# Altium PCB 新苗.PcbDoc
Units mil, origin at the board's own origin, x right, y up, seen from the top; angles counter-clockwise.
Board outline 6000 x 4000 mil, 2 copper layers (Top Layer, Bottom Layer); 35 components, 128 nets, 275 pads, 55 vias.
Unrouted connection lines stored in the file: 49.
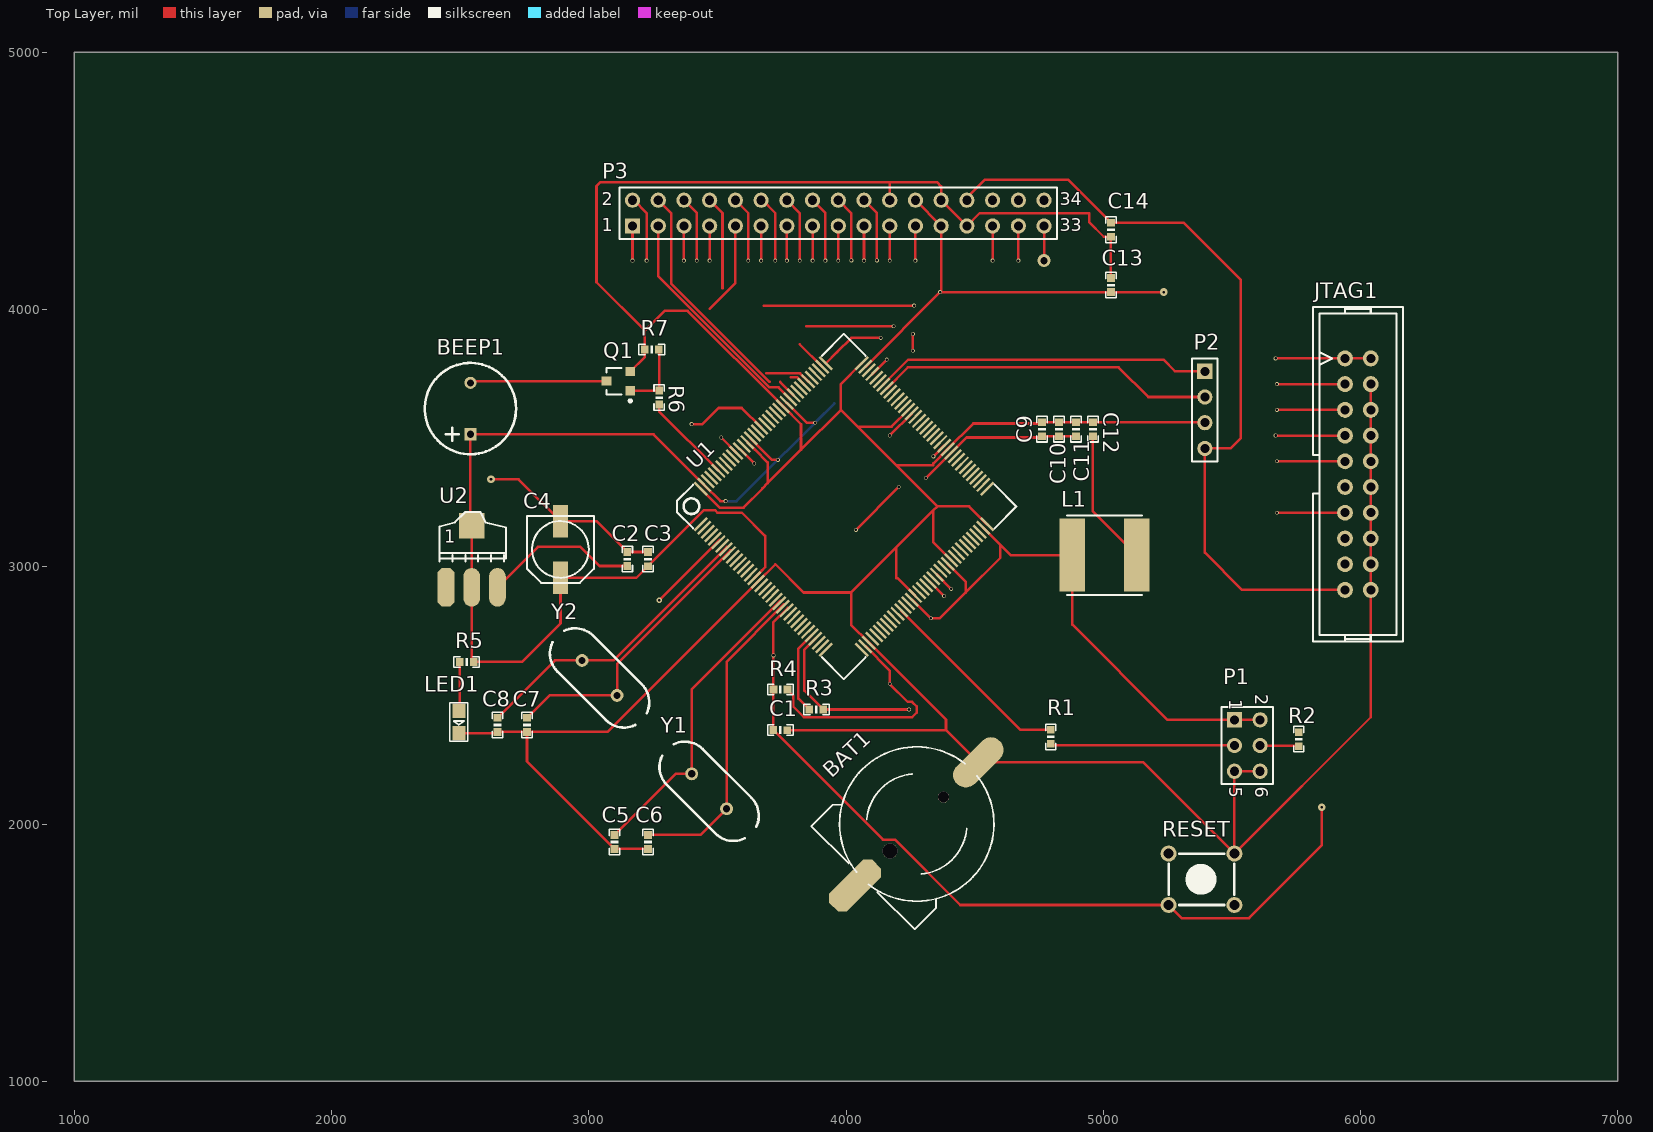
[diagram p0: Top Layer view]
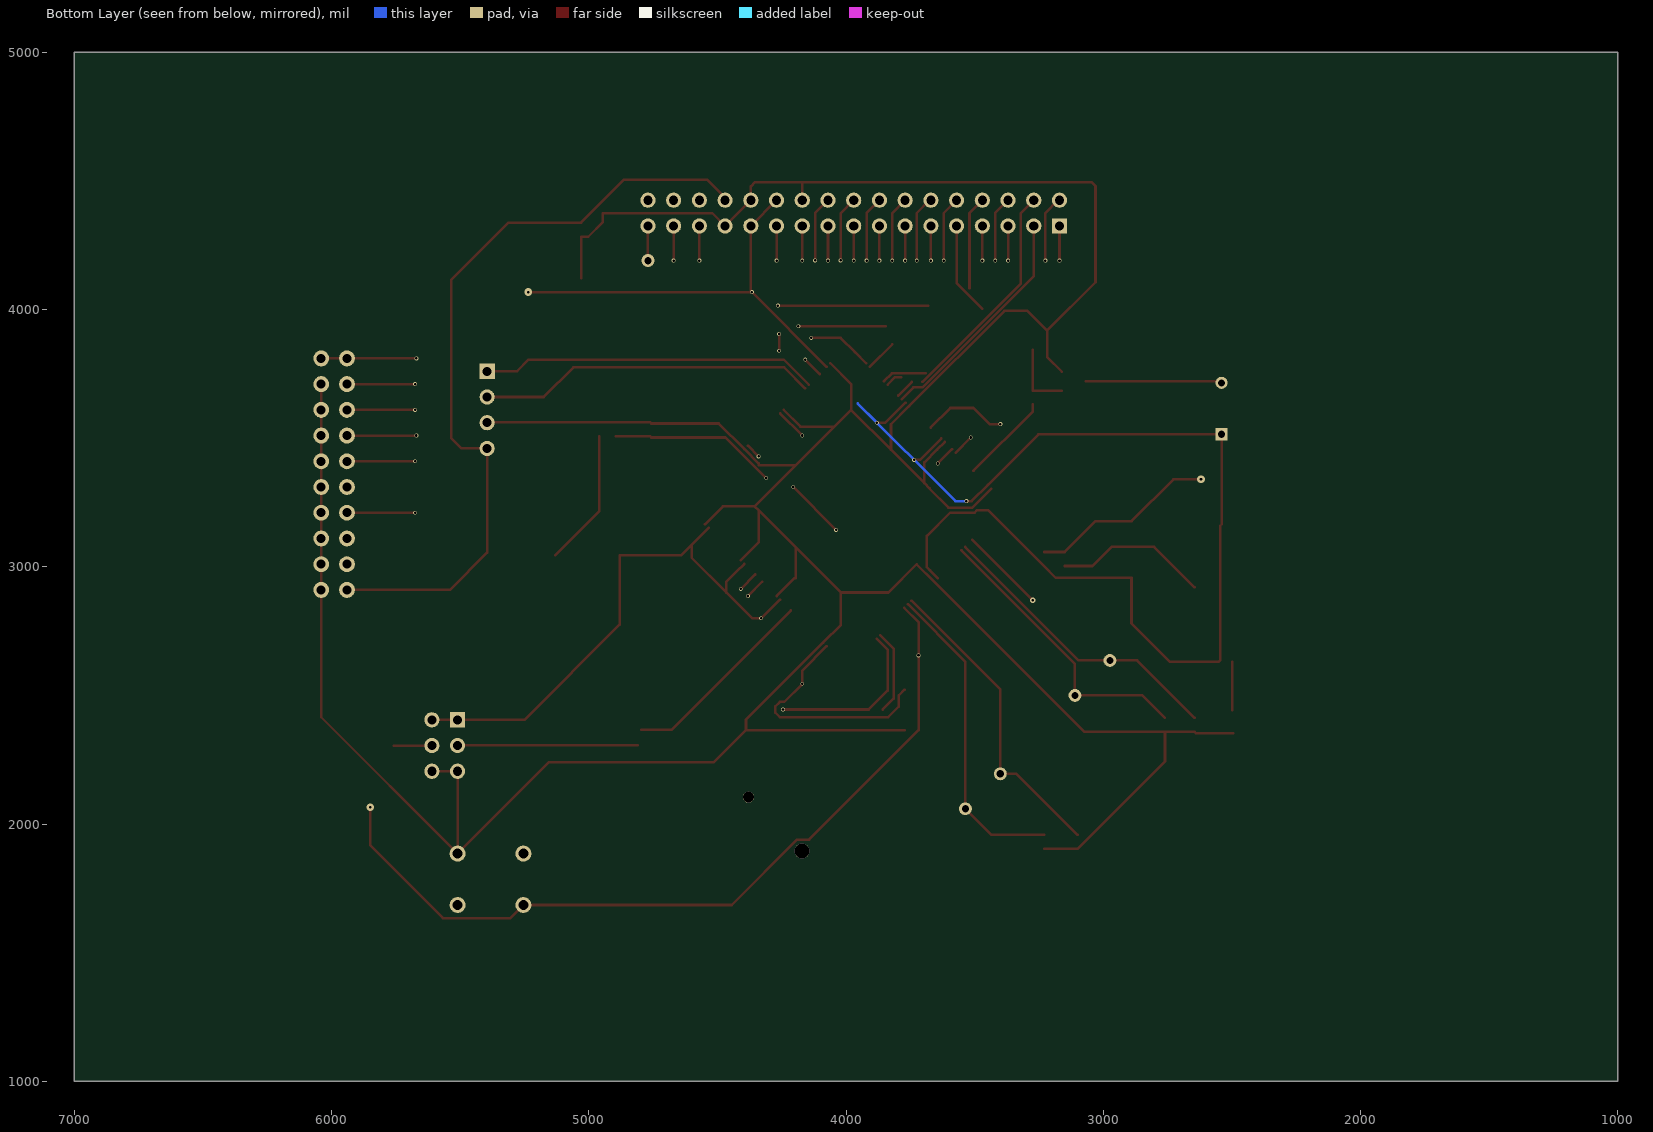
[diagram p1: Bottom Layer view, seen from below]

## Layer stack, top to bottom
Top Layer: signal copper 1.4
Dielectric: dielectric 12.6, FR-4, Dk 4.8
Bottom Layer: signal copper 1.4

## Board outline
1000,1000 7000,1000 7000,5000 1000,5000

## Design rules (kind name [scope] priority, off if disabled: settings)
Clearance [All] p1: gap=5
HoleToHoleClearance [All] p1: gap=1 allowstackedmicrovias=TRUE
MinimumSolderMaskSliver [All] p1: minsoldermaskwidth=1
PolygonConnect [All] p1: connectstyle=Relief reliefconductorwidth=10 reliefentries=4 polygonreliefangle="90 Angle" airgapwidth=10
RoutingVias [All] p1: holewidth=10 width=15 viastyle="Through Hole" minholewidth=10 minwidth=15 maxholewidth=10 maxwidth=15
SilkToSilkClearance [All] p1: silktosilkclearance=8
SolderMaskExpansion [All] p1: expansion=3
Width [All] p1: maxlimit=10 minlimit=10 preferedwidth=10
Width GND [All] p2: maxlimit=15 minlimit=15 preferedwidth=15
Width 3V3 [All] p3: maxlimit=20 minlimit=20 preferedwidth=20
Width +5 [All] p4: maxlimit=30 minlimit=30 preferedwidth=30
25 further rules are at their usual default settings.

## Components (designator, comment, footprint, x,y, rotation, side; value= is the part's Value field where it differs from the comment)
BAT1 "BATT" BATM 4275,2000 r315 top
BEEP1 "BEEP" BELL-5 2540,3515 r90 top
C1 "0.1uF" 0603P 3745,2365 r180 top
C2 "0.1uF" 0603P 3150,3030 r90 top
C3 "0.1uF" 0603P 3230.06,3030 r270 top
C4 "47uF" CC6.56.5 2890,3067.33 r90 top
C5 "22pF" 0603P 3100,1930 r90 top
C6 "22pF" 0603P 3230,1930 r90 top
C7 "22pF" 0603P 2760,2385 r90 top
C8 "22pF" 0603P 2645,2385 r90 top
C9 "0.1uF" 0603P 4762.13,3535 r270 top
C10 "0.1uF" 0603P 4828.13,3535 r270 top
C11 "0.1uF" 0603P 4894.13,3535 r270 top
C12 "1uF" 0603P 4960,3535 r270 top
C13 "104" 0603P 5030,4095 r90 top
C14 "104" 0603P 5030,4310 r90 top
JTAG1 "JTAG" JTAG_20 5990,3360 r270 top
L1 "4.7uH" L_SOP74 5130,3045 r180 top
LED1 "RED" SMDLED 2495,2440 r270 top
P1 "Header 3X2" HDR2X3 5510,2405 r270 top
P2 "Header 4" HDR1X4 5395,3760 r270 top
P3 "Header 17X2" HDR2X17 3170,4325 r0 top
Q1 "S8050" SOT-23R 3120,3721.54 r90 top
R1 "100K" 0603P 4795.59,2338.5 r90 top
R2 "100K" 0603P 5760,2330 r270 top
R3 "0" 0603P 3885,2445 r180 top
R4 "1K" 0603P 3745,2522.58 r0 top
R5 "510" 0603P 2525,2630 r0 top
R6 "1K" 0603P 3273.54,3657.68 r90 top
R7 "10K" 0603P 3245,3845 r0 top
RESET "KEY_M" KEY_M 5510,1685 r180 top
U1 "STM32F103ZET6" LQFP144 3435,3165 r45 top
U2 "AMS1117-3.3" AMS1117 2445,2920 r0 top
Y1 "8MHz" XTAL_US 3400,2195 r315 top
Y2 "32.768KHz" XTAL_US 3110,2500 r135 top

## Footprints (in the part's own frame and the unit in brackets; to place one, negate y for a bottom-side part, rotate by r counter-clockwise, add the part's x,y. Pads: shape width x height; smd on the part's side, far side on the other; paste and mask are expansions set on the pad)
0603P [mil]
  rect 30x30 smd: 1(-27,0) 2(27.5,-0.06)
  silkscreen extent -50,-20 50,20
AMS1117 [mil]
  oct 65x150 smd: 1(0.03,-0.06)
  oval 65x150 smd: 2(100.03,-0.06) 3(200.03,-0.06)
  rect 100x100 smd: 4(100.03,239.94)
  silkscreen extent -26,100 234,293
BATM [mm]
  round 1.1 hole 1.1 unplated: 0(0,3.748)
  round 1.5 hole 1.5 unplated: 0(0.025,-3.752)
  oct 2.5x6 smd: 1(0,-8.602)
  oval 2.5x6 smd: 2(0,8.598)
  silkscreen extent -7.62,-7.58 7.62,7.57
BELL-5 [mm]
  rect 1.2x1.2 hole 0.7: 1(0,0)
  round 1.2 hole 0.7: 2(5.08,0)
  silkscreen extent -1.97,-4.51 7.05,4.51
CC6.56.5 [mm]
  rect 3.2x1.5 smd: 1(-2.794,0) 2(2.8,0)
  silkscreen extent -3.3,-3.3 3.3,3.3
HDR1X4 [mm]
  rect 1.5x1.5 hole 0.889: 1(0,0)
  round 1.5 hole 0.889: 2(2.54,0) 3(5.08,0) 4(7.62,0)
  silkscreen extent -1.27,-1.27 8.89,1.27
HDR2X3 [mm] "Connector; Header; 3x2 Position"
  rect 1.5x1.5 hole 0.9: 1(0,0)
  round 1.5 hole 0.9: 2(0,2.54) 3(2.54,0) 4(2.54,2.54) 5(5.08,0) 6(5.08,2.54)
  silkscreen extent -1.27,-1.27 6.35,3.81
HDR2X17 [mm] "Connector; Header; 17x2 Position"
  rect 1.5x1.5 hole 0.9: 1(0,0)
  round 1.5 hole 0.9: 2(0,2.54) 3(2.54,0) 4(2.54,2.54) 5(5.08,0) 6(5.08,2.54) 7(7.62,0) 8(7.62,2.54) 9(10.16,0) 10(10.16,2.54) 11(12.7,0) 12(12.7,2.54) 13(15.24,0) 14(15.24,2.54) 15(17.78,0) 16(17.78,2.54) 17(20.32,0) 18(20.32,2.54) 19(22.86,0) 20(22.86,2.54) 21(25.4,0) 22(25.4,2.54) 23(27.94,0) 24(27.94,2.54) 25(30.48,0) 26(30.48,2.54) 27(33.02,0) 28(33.02,2.54) 29(35.56,0) 30(35.56,2.54) 31(38.1,0) 32(38.1,2.54) 33(40.64,0) 34(40.64,2.54)
  silkscreen extent -1.27,-1.27 41.91,3.81
JTAG_20 [mil]
  round 62 hole 35: 1(-450,-50) 2(-450,50) 3(-350,-50) 4(-350,50) 5(-250,-50) 6(-250,50) 7(-150,-50) 8(-150,50) 9(-50,-50) 10(-50,50) 11(50,-50) 12(50,50) 13(150,-50) 14(150,50) 15(250,-50) 16(250,50) 17(350,-50) 18(350,50) 19(450,-50) 20(450,50)
  silkscreen extent -650,-175 650,175
KEY_M [mil]
  round 62 hole 38: 1(0,0) 1(255.91,0) 2(0,-200) 2(255.91,-200)
  silkscreen extent 0,-200 255,0
L_SOP74 [mm]
  rect 2.5x7.2 smd: 1(0,0) 2(6.35,0)
  silkscreen extent -0.51,-3.94 6.89,3.94
LQFP144 [mil]
  rect 70.87x10 smd: 1(-0.36,0.02) 2(-0.35,-19.66) 3(-0.35,-39.35) 4(-0.35,-59.03) 5(-0.36,-78.72) 6(-0.35,-98.4) 7(-0.35,-118.09) 8(-0.35,-137.77) 9(-0.35,-157.46) 10(-0.35,-177.14) 11(-0.35,-196.83) 12(-0.36,-216.51) 13(-0.35,-236.2) 14(-0.35,-255.88) 15(-0.35,-275.57) 16(-0.35,-295.25) 17(-0.35,-314.94) 18(-0.35,-334.62) 19(-0.35,-354.31) 20(-0.35,-373.99) 21(-0.36,-393.68) 22(-0.35,-413.36) 23(-0.35,-433.05) 24(-0.35,-452.73) 25(-0.35,-472.42) 26(-0.35,-492.1) 27(-0.35,-511.79) 28(-0.36,-531.47) 29(-0.35,-551.16) 30(-0.35,-570.84) 31(-0.35,-590.53) 32(-0.36,-610.21) 33(-0.35,-629.9) 34(-0.35,-649.58) 35(-0.35,-669.27) 36(-0.35,-688.95) 73(885.47,-688.95) 74(885.47,-669.27) 75(885.47,-649.58) 76(885.47,-629.9) 77(885.47,-610.21) 78(885.47,-590.53) 79(885.47,-570.84) 80(885.47,-551.16) 81(885.47,-531.47) 82(885.47,-511.79) 83(885.47,-492.1) 84(885.47,-472.42) 85(885.47,-452.73) 86(885.47,-433.05) 87(885.47,-413.36) 88(885.47,-393.68) 89(885.47,-373.99) 90(885.47,-354.31) 91(885.47,-334.62) 92(885.47,-314.94) 93(885.47,-295.25) 94(885.47,-275.57) 95(885.47,-255.88) 96(885.47,-236.2) 97(885.47,-216.51) 98(885.47,-196.83) 99(885.47,-177.14) 100(885.47,-157.46) 101(885.47,-137.77) 102(885.47,-118.09) 103(885.47,-98.4) 104(885.47,-78.72) 105(885.47,-59.03) 106(885.47,-39.35) 107(885.47,-19.66) 108(885.47,0.02)
  rect 10x70.87 smd: 37(98.07,-787.38) 38(117.76,-787.38) 39(137.44,-787.38) 40(157.13,-787.38) 41(176.81,-787.38) 42(196.5,-787.38) 43(216.18,-787.38) 44(235.87,-787.38) 45(255.55,-787.38) 46(275.24,-787.38) 47(294.92,-787.38) 48(314.61,-787.38) 49(334.29,-787.38) 50(353.98,-787.38) 51(373.66,-787.38) 52(393.35,-787.38) 53(413.03,-787.38) 54(432.72,-787.38) 55(452.4,-787.38) 56(472.09,-787.38) 57(491.77,-787.38) 58(511.46,-787.38) 59(531.14,-787.38) 60(550.83,-787.38) 61(570.51,-787.38) 62(590.2,-787.38) 63(609.88,-787.38) 64(629.57,-787.38) 65(649.25,-787.38) 66(668.94,-787.38) 67(688.62,-787.38) 68(708.31,-787.38) 69(727.99,-787.38) 70(747.68,-787.38) 71(767.36,-787.38) 72(787.05,-787.38) 109(787.05,98.45) 110(767.36,98.45) 111(747.67,98.45) 112(727.99,98.45) 113(708.31,98.45) 114(688.62,98.45) 115(668.94,98.45) 116(649.25,98.45) 117(629.57,98.45) 118(609.88,98.45) 119(590.2,98.45) 120(570.51,98.45) 121(550.82,98.45) 122(531.14,98.45) 123(511.46,98.45) 124(491.77,98.45) 125(472.09,98.45) 126(452.4,98.45) 127(432.72,98.45) 128(413.03,98.45) 129(393.35,98.45) 130(373.66,98.45) 131(353.98,98.45) 132(334.29,98.45) 133(314.61,98.45) 134(294.92,98.45) 135(275.24,98.45) 136(255.55,98.45) 137(235.87,98.45) 138(216.18,98.45) 139(196.5,98.45) 140(176.81,98.45) 141(157.12,98.45) 142(137.44,98.45) 143(117.76,98.45) 144(98.07,98.45)
  silkscreen extent -32,-819 917,130
SMDLED [mm]
  rect 1.4x1.27 smd: 1(0.001,-0.002) 2(2.211,-0.002)
  silkscreen extent -0.8,-0.89 3.01,0.89
SOT-23R [mm]
  rect 0.9x0.95 smd: 1(0.95,-1.048) 2(-0.95,-1.048) 3(0,1.302)
  silkscreen extent -2.07,-1.17 1.3,1.3
XTAL_US [mil]
  round 50 hole 28: 1(0,0) 2(192.13,0)
  silkscreen extent -131,-98 323,98

## Part data
BAT1: library part BAT
C1 C2 C3 C5 C6 C7 C8 C9 C10 C11 C12 C13 C14: library part C
C4: library part CAP
L1: library part L_SOP
LED1: library part LED2, "Typical RED, GREEN, YELLOW, AMBER GaAs LED"
P1: "Header, 3-Pin, Dual row"
P2: "Header, 4-Pin"
P3: "Header, 17-Pin, Dual row"
Q1: library part NPN, "8050/BCW846/BCW847"
R1 R2 R3 R4 R5 R6 R7: library part R
U2: library part AMS1117
Y1 Y2: library part XTAL, "Crystal Oscillator"

## Via types
v1: diameter 15, hole 10, Top Layer to Bottom Layer, 50 vias
v2: diameter 30, hole 10, Top Layer to Bottom Layer, 3 vias
v3: diameter 20, hole 10, Top Layer to Bottom Layer, 1 vias
v4: diameter 50, hole 28, Top Layer to Bottom Layer, 1 vias

## Nets (pads, with @x,y where several pads share a name; then routed paths per layer and width w, separated by ;. In a path a pad name is that pad's centre, name@x,y a point inside that pad or via, vN(x,y) a via of type N, cw(c..) or ccw(c..) an arc to the next point about the centre after c; other vN are vias at no path point)
3V3: BEEP1.1 C3.2 C4.1 C9.2 C10.2 C11.2 C13.1 JTAG1.1 JTAG1.2 L1.2 P1.1 P1.2 P3.24 P3.25 R4.2 R5.2 U1.16 U1.38 U1.51 U1.61 U1.71 U1.83 U1.94 U1.107 U1.120 U1.130 U1.143 U2.2 U2.4 | length 10664.6
  Top Layer w10: U2.4@2540,3164.97 BEEP1.1 3251.53,3515 U1.143 3511.53,3255 v1(3532.17,3255) ; U2.4 U2.2 2545.03,2637.4 R5.2 2739.94,2629.94 2890,2780 C4.1 3184.83,2957.33 C3.2 3447.5,3220 3490.41,3220 3500.41,3210 3595.28,3210 3685.28,3120 3685.28,2998.18 3673.19,2986.09 3673.19,2985.65 U1.16 ; U1.130 3713.12,3415.32 v1(3735,3415.32) ; U1.120 3846.82,3560 v1(3880.15,3560) ; R4.2 3795,2500.02 3795,2456.35 3836.35,2415 4257.43,2415 4275,2432.57 4275,2457.43 4257.43,2475 4240,2475 v1(4170,2545) 4170,2596.53 U1.38 ; U1.107 v1(4365.81,4068) ; v1@4170,3510 v1(4170,3510.29) U1.94 ; U1.51 4328.44,2800 4365,2800 4464.77,2899.77 ; P3.24 P3.25 4370,4072.19 v1(4365.81,4068) ; v1(4310,3345) 4310.94,3345 U1.83 4468.44,3502.5 4757.06,3502.5 C9.2 C10.2 C11.2 ; U1.61 4424.84,2981.98 4464.77,2942.06 4464.77,2899.77 ; U1.71 4600,3085.21 ; v2(5235,4068) C13.1 v1(4365.81,4068) ; P1.2 P1.1 5250,2405 4880,2775 L1.2 4640.21,3045 4600,3085.21 ; v1(5670,3810) JTAG1.1 JTAG1.2 ; 4464.77,2899.77 4600,3035 4600,3085.21
  Bottom Layer w10: v1@3880.08,3560.08 3955,3635 3575,3255 ; 3575,3255 3530,3255 3575,3255
  other v1: 4330,2800
+5: C2.1 C14.2 JTAG1.19 P2.4 P3.28 U2.3 | length 3638.1
  Top Layer w10: U2.3 2802.43,3077.33 2967.67,3077.33 3042,3003 C2.1 ; P3.28@4470,4435 4540,4505 4862.56,4505 C14.2 5312.5,4337.5 5535,4115 5535,3500 5495,3460 P2.4 5395,3055 5540,2910 JTAG1.19
BEEP: R6.1 U1.139 | length 352.7
  Top Layer w10: R6.1 3273.54,3604.35 U1.139
BL: P3.23 U1.46 | length 135
  Top Layer w10: v1(4270,4190) P3.23
BOOT0: R2.1 U1.138
BOOT1: P3.29 R1.2 U1.48 | length 908.9
  Top Layer w10: U1.48 4678.92,2366 R1.2 ; v1(4570,4190) P3.29
CLK: P3.34 U1.47
CS: P3.33 U1.49 | length 135
  Top Layer w10: v4(4770,4190) P3.33
D0: P3.6 U1.85 | length 550.5
  Top Layer w10: P3.6 3420,4375 v1(3420,4190) ; v1(4038.3,3143.52) v1(4204.98,3310.21) ; v1(4339.49,3429.24) U1.85
D1: P3.7 U1.86 | length 135
  Top Layer w10: v1(3470,4190) P3.7
D2: P3.8 U1.114 | length 537.4
  Top Layer w10: P3.8 3520,4375 3520,4190 3520,4082.48 ; 3690.72,3751.9 3821.95,3751.9 U1.114
D3: P3.9 U1.115 | length 429
  Top Layer w10: 3470,4002.55 3570,4102.55 3570,4190 P3.9 ; 3785.44,3736.9 3809.12,3736.9 U1.115
D4: P3.10 U1.58 | length 334.5
  Top Layer w10: P3.10 3620,4375 v1(3620,4190) ; U1.58 v1(4409.09,2914.22)
D5: P3.11 U1.59 | length 135
  Top Layer w10: v1(3670,4190) P3.11
D6: P3.12 U1.60 | length 260.7
  Top Layer w10: P3.12 3675,4425 3725,4375 v1(3725,4190)
D7: P3.13 U1.63 | length 135
  Top Layer w10: v1(3770,4190) P3.13
D8: P3.14 U1.64 | length 255.7
  Top Layer w10: P3.14 3820,4375 v1(3820,4190)
D9: P3.15 U1.65 | length 135
  Top Layer w10: v1(3870,4190) P3.15
D10: P3.16 U1.66 | length 255.7
  Top Layer w10: P3.16 3920,4375 v1(3920,4190)
D11: P3.17 U1.67 | length 135
  Top Layer w10: v1(3970,4190) P3.17
D12: P3.18 U1.68 | length 255.7
  Top Layer w10: P3.18 4020,4375 4020.77,4375 v1(4020.77,4190.77)
D13: P3.19 U1.77 | length 135
  Top Layer w10: v1(4070,4190) P3.19
D14: P3.20 U1.78 | length 254.9
  Top Layer w10: P3.20 4120,4375 v1(4120,4190.77)
D15: P3.21 U1.79 | length 135
  Top Layer w10: v1(4170,4190) P3.21
GND: BAT1.2 C1.1 C5.1 C6.1 C7.1 C8.1 C9.1 C10.1 C11.1 C12.1 C13.2 C14.1 JTAG1.4 JTAG1.6 JTAG1.8 JTAG1.10 JTAG1.12 JTAG1.14 JTAG1.16 JTAG1.18 JTAG1.20 LED1.2 P1.5 P1.6 P2.3 P3.22 P3.26 P3.27 Q1.1 R7.1 RESET.2 U1.17 U1.39 U1.52 U1.62 U1.72 U1.84 U1.95 U1.108 U1.121 U1.131 U1.144 | length 16122.6
  Top Layer w10: LED1.2 C8.1@2639.96,2352.96 ; C8.1 C7.1 ; Q1.1 3218,3815.68 R7.1 3218,3918 ; C6.1 C5.1 2760,2243 C7.1 ; U1.144 3508.69,3230 3601.77,3230 3675,3303.23 3675,3305 3695,3325 ; U1.131 3645.36,3455.24 3695,3405.6 3695,3325 ; C1.1 4388.74,2365 ; U1.108 3980,3710.03 3980,3610 ; P3.22 4170,4490 4175,4495 ; U1.95 4176.87,3545 4045,3545 ; U1.52 4200.3,2955.98 4195,2955.98 4195,3075 ; U1.62 4340,3094.66 4340,3220 ; U1.72 4478.05,3235 4355,3235 ; C13.2@5030,4122.56 C14.1 5002,4283 4945,4340 4945,4375 4520,4375 P3.27 P3.26 4370,4478.41 4353.41,4495 4175,4495 ; P2.3@5393,3562 C12.1 C11.1 C10.1 C9.1 4757.13,3557 4495.1,3557 U1.84 4339.49,3401.4 4339.49,3395 4195,3395 ; P1.6 P1.5 RESET.2@5510,1885 ; JTAG1.4 JTAG1.6 JTAG1.8 JTAG1.10 JTAG1.12 JTAG1.14 JTAG1.16 JTAG1.18 JTAG1.20 6040,2415 RESET.2@5510,1885 ; C7.1 3073.39,2358 U1.17 3725,3009.61 3725,3010 3835,2900 4020,2900 ; 3218,3918 3295,3995 3383.99,3995 U1.121 3825,3553.99 3825,3455 ; 3218,3918 3030,4106 3030,4480 3045,4495 4175,4495 ; 3695,3325 3825,3455 ; 3825,3455 3980,3610 ; 3980,3610 4045,3545 ; 4020,2900 4020,2774.37 U1.39 4388.74,2405.63 4388.74,2365 ; 4020,2900 4195,3075 ; 4045,3545 4195,3395 ; 4195,3075 4340,3220 ; 4195,3395 4355,3235 ; 4340,3220 4355,3235 ; 4388.74,2365 BAT1.2 5155.63,2239.37 RESET.2@5510,1885
JNRST: JTAG1.3 U1.134 | length 933.8
  Top Layer w10: v1(3515,3502.5) 3515,3502.08 U1.134 ; 3680,4015 v1(4265,4015) ; v1(5675,3710) JTAG1.3
JTCK: JTAG1.9 U1.109 | length 584
  Top Layer w10: U1.109 3965.77,3835 4020.77,3890 v1(4135,3890) ; v1(4260,3840) v1(4260,3905) ; v1(5675,3410) JTAG1.9
JTDI: JTAG1.5 U1.110 | length 729.4
  Top Layer w10: 3820,3865 3907.78,3777.22 U1.110 ; 3845,3935 v1(4185,3935) ; v1(5675,3610) JTAG1.5
JTDO: JTAG1.13 U1.133 | length 343.7
  Top Layer w10: U1.133 v1(3643.52,3401.4) ; v1(5675,3210) JTAG1.13
JTMS: JTAG1.7 U1.105 | length 348.9
  Top Layer w10: U1.105 v1(4158.54,3805.06) ; v1(5670,3510.29) 5670.29,3510 JTAG1.7
LCD_CS: P3.1 U1.127 | length 464.2
  Top Layer w10: v1(3170,4190) P3.1 ; v1(3400,3554.3) 3441.69,3554.3 3504.7,3617.32 3594.64,3617.32 U1.127
MOSI: P3.30 U1.21
NetBEEP1_2: BEEP1.2 Q1.3 | length 522.2
  Top Layer w10: BEEP1.2@2546.54,3721.54 Q1.3
NetC2_2: C2.2 C3.1 C4.2 U2.1 | length 726.6
  Top Layer w10: v2(2620,3340) 2727.57,3340 C4.2 3030,3177.57 C2.2 C3.1@3229.56,3057.5
NetLED1_1: LED1.1 R5.1 | length 187
  Top Layer w10: LED1.1@2498,2443.03 R5.1
NetP1_3: P1.3 R1.1 | length 700
  Top Layer w10: R1.1@4809.09,2305.91 P1.3@5509.09,2305.91
NetP1_4: P1.4 R2.2 | length 147.4
  Top Layer w10: P1.4 R2.2@5757.44,2305
NetQ1_2: Q1.2 R6.2 R7.2 | length 270
  Top Layer w10: Q1.2 R6.2@3272.56,3684.14 ; R6.2 R7.2@3273.6,3843.84
NetR3_2: R3.2 U1.32 | length 327
  Top Layer w10: R3.2 3815,2487.56 3815,2682.03 U1.32
NRST: C1.2 JTAG1.15 P3.5 R4.1 RESET.1 U1.25 | length 3333.4
  Top Layer w10: v1(3370,4190) P3.5 ; C1.2 4143.17,1939.39 4189.7,1939.39 4444.09,1685 5254.09,1685 5305,1634.09 5566.53,1634.09 5850,1917.56 v2(5850,2065) ; C1.2@3718,2365.56 R4.1 3718,2784.9 U1.25@3773.8,2840.7
  other v1: 3718.12,2655.28
PA0: U1.34
PA1: U1.35
PA2: U1.36
PA3: U1.37
PA4: U1.40
PA5: U1.41
PA6: U1.42
PA7: U1.43
PA8: U1.100
PA9: P2.2 U1.101 | length 1317.9
  Top Layer w10: U1.101 4240,3775.16 5060.02,3775.16 5175.18,3660 P2.2
PA10: P2.1 U1.102 | length 1309.4
  Top Layer w10: U1.102 4242.06,3805.06 5233.89,3805.06 5278.94,3760 P2.1
PA11: U1.103
PA12: U1.104
PB5: U1.135
PB6: U1.136
PB7: U1.137
PB9: U1.140
PB10: U1.69
PB11: U1.70
PB12: U1.73
PB13: U1.74
PB14: U1.75
PB15: U1.76
PC0: U1.26
PC1: U1.27
PC2: U1.28
PC3: U1.29
PC4: U1.44
PC5: U1.45
PC6: U1.96
PC7: U1.97
PC8: U1.98
PC9: U1.99
PC10: U1.111
PC11: U1.112
PC12: U1.113
PC13: U1.7
PC14: C8.2 U1.8 Y2.2 | length 1167.5
  Top Layer w10: C8.2 2868.42,2635.85 Y2.2 3095.69,2635.85 U1.8@3537.17,3077.33
PC15: C7.2 U1.9 Y2.1 | length 1132.3
  Top Layer w10: C7.2 2847.56,2500 Y2.1 3110,2622.32 U1.9@3551.09,3063.41
PD2: U1.116
PD3: U1.117
PD4: P3.4 U1.118 | length 960.3
  Top Layer w10: P3.4 3320,4375 3320,4190 3320,4101.41 3702.81,3718.61 ; 3743.9,3718.61 U1.118
PD5: P3.3 U1.119 | length 905.6
  Top Layer w10: P3.3 3270,4130.2 3702.99,3697.21 3737.46,3697.21 U1.119
PD6: U1.122
PD7: U1.123
PD11: U1.80
PD12: U1.81
PD13: U1.82
PE0: U1.141
PE1: U1.142
PE2: U1.1
PE3: U1.2
PE4: U1.3
PE5: U1.4
PE6: U1.5
PEN: P3.31 U1.22 | length 135
  Top Layer w10: v1(4670,4190) P3.31
PF0: U1.10
PF1: U1.11
PF2: U1.12
PF3: U1.13
PF4: U1.14
PF5: U1.15
PF6: U1.18
PF7: U1.19
PF8: U1.20
PF12: U1.50
PF13: U1.53
PF14: U1.54
PF15: U1.55
PG0: P3.2 U1.56 | length 339.5
  Top Layer w10: P3.2 3175,4425 3225,4375 v1(3225,4190) ; U1.56 v1(4381.25,2886.38)
PG1: U1.57
PG2: U1.87
PG3: U1.88
PG4: U1.89
PG5: U1.90
PG6: U1.91
PG7: U1.92
PG8: U1.93
PG9: U1.124
PG10: U1.125
PG11: U1.126
PG13: U1.128
PG14: U1.129
PG15: U1.132
VBAT: BAT1.1 U1.6 | length 332.6
  Top Layer w10: v3(3274.16,2870) U1.6@3509.33,3105.17
VDDA: C12.2 L1.1 R3.1 U1.33 | length 1188.1
  Top Layer w10: U1.33 3838.4,2677.59 3838.4,2518.6 R3.1 v1(4245,2445) ; C12.2 4959.94,3215.06 L1.1
X1: C5.2 U1.23 Y1.1 | length 1215.2
  Top Layer w10: C5.2 3337.56,2195 Y1.1 3400,2522.58 U1.23@3745.96,2868.54
X2: C6.2 U1.24 Y1.2 | length 1236.2
  Top Layer w10: C6.2 3434.21,1957.5 Y1.2 3535.85,2630.59 U1.24@3759.88,2854.62
pads on no net: BAT1.0 JTAG1.11 JTAG1.17 P3.32 U1.30 U1.31 U1.106

## Text inside footprints (layer, text, board x,y; h text height)
P1: Top Overlay "1" at 5490,2485 h50 r270; Top Overlay "2" at 5590,2505 h50 r270; Top Overlay "5" at 5490,2145 h50 r270; Top Overlay "6" at 5590,2145 h50 r270
P3: Top Overlay "34" at 4830,4405 h50; Top Overlay "33" at 4830,4305 h50; Top Overlay "1" at 3050,4305 h50; Top Overlay "2" at 3050,4405 h50
U2: Top Overlay "1" at 2439.03,3092.94 h50